# Altium PCB Receiver Board.PcbDoc
Units mil, origin at the board's own origin, x right, y up, seen from the top; angles counter-clockwise.
Board outline 2000 x 1000 mil, 2 copper layers (Top Layer, Bottom Layer); 23 components, 21 nets, 121 pads, 30 vias.
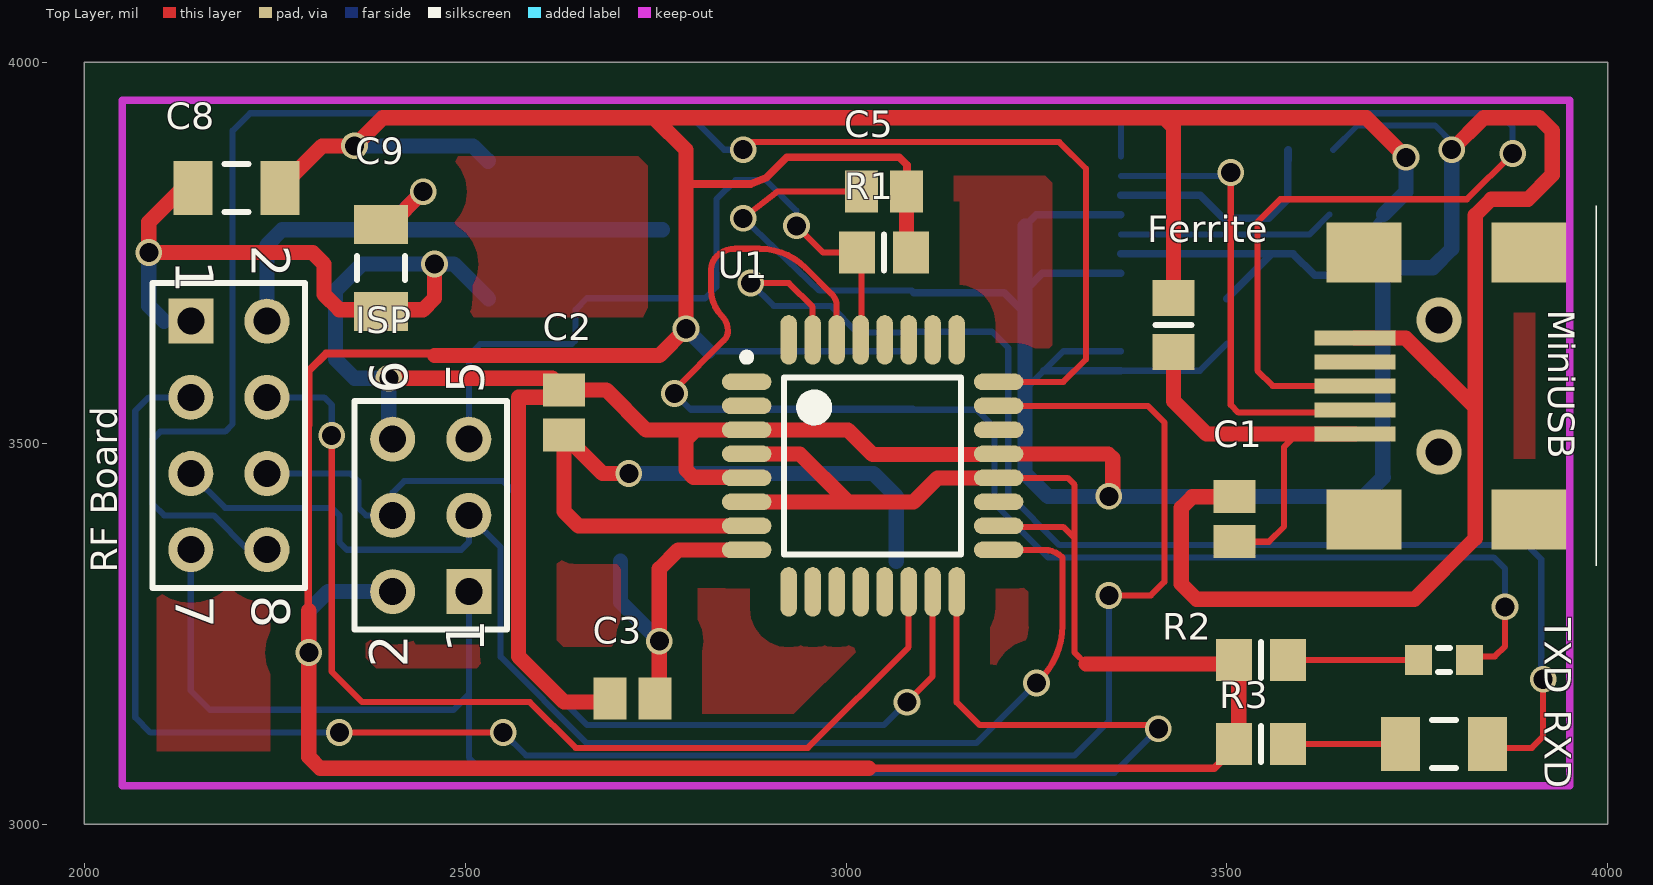
[diagram p0: Top Layer view]
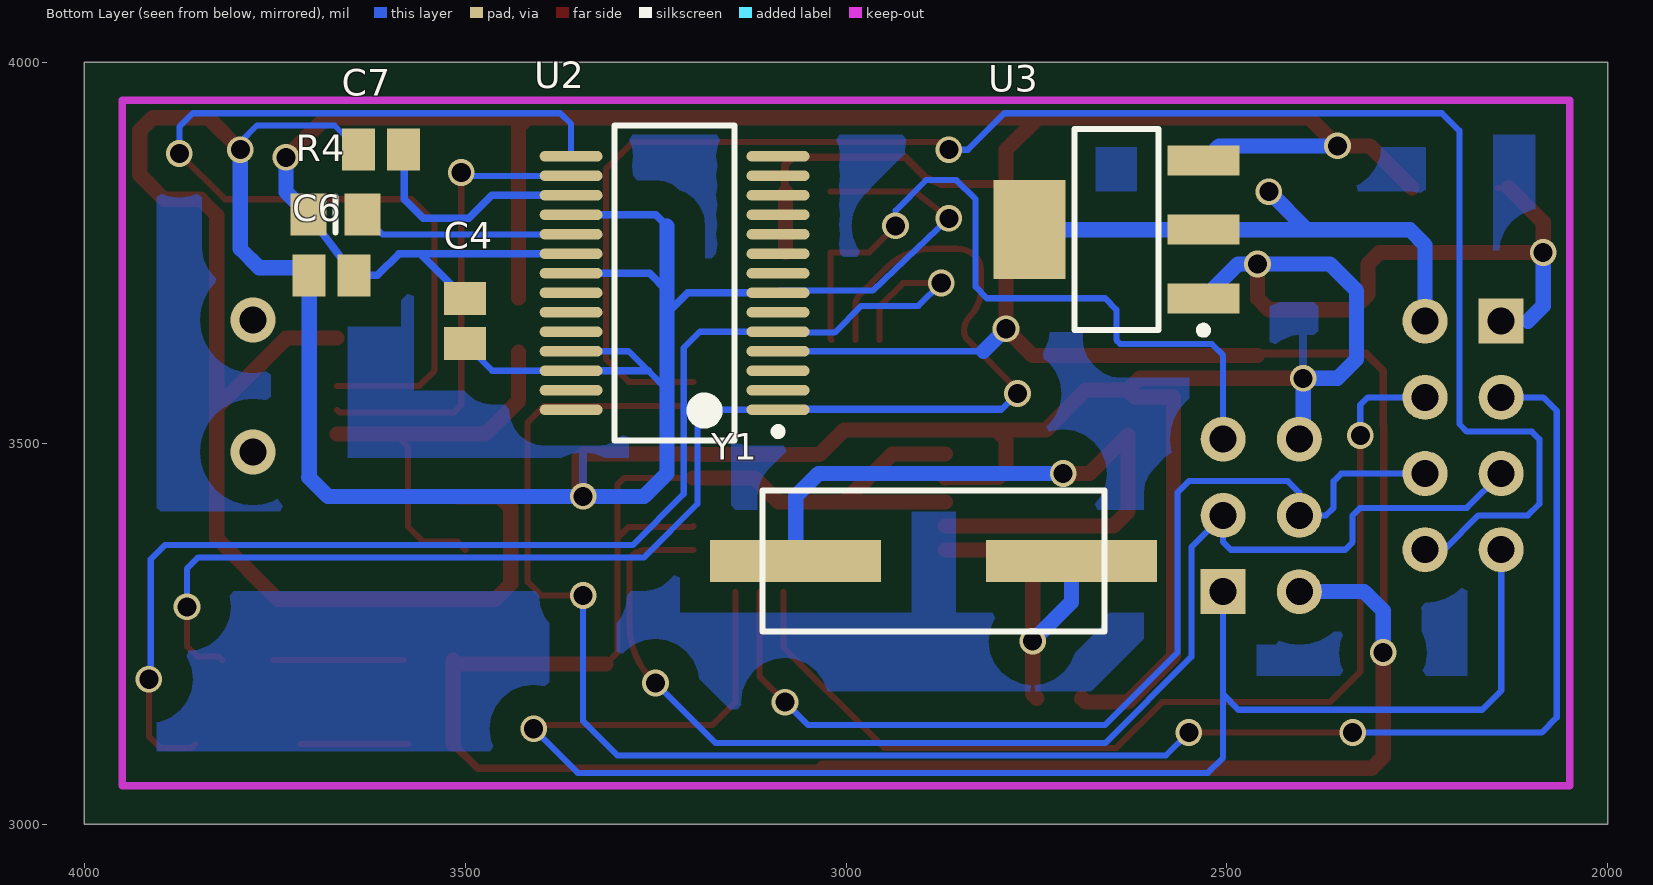
[diagram p1: Bottom Layer view, seen from below]

## Layer stack, top to bottom
Top Layer: signal copper 1.4
Dielectric: dielectric 12.6, FR-4, Dk 4.8
Bottom Layer: signal copper 1.4

## Board outline
2000,3000 4000,3000 4000,4000 2000,4000

## Design rules (kind name [scope] priority, off if disabled: settings)
Clearance "Polygon Clearance" [InPolygon] p1: gap=40
Clearance [All] p2: gap=8.1
HoleSize [All] p1: absolutevalues=TRUE maxlimit=100 minlimit=24 maxpercent=80.000 minpercent=20.000
PolygonConnect [All] p1: connectstyle=Relief reliefconductorwidth=10 reliefentries=4 polygonreliefangle="90 Angle"
RoutingVias [All] p1: holewidth=25 width=35 viastyle="Through Hole" minholewidth=25 minwidth=35 maxholewidth=25 maxwidth=35
SilkscreenOverComponentPads [All] p1: minsilkscreentomaskgap=10
SolderMaskExpansion [All] p1: expansion=4
Width [All] p1: maxlimit=50 minlimit=8 preferedwidth=8
26 further rules are at their usual default settings.

## Classes and differential pairs
component class "5V to 3.3V": C8 C9 U3
component class "2.4ghz Receiver Board": C1 C2 C3 C4 C5 C6 C7 Ferrite ISP MiniUSB R1 R2 R3 R4 "RF Board" RXD TXD U1 U2 Y1

## Components (designator, comment, footprint, x,y, rotation, side; value= is the part's Value field where it differs from the comment)
C1 "Cap Semi" CAPC2012L 3510,3400 r90 top
C2 "Cap Semi" CAPC2012L 2630,3540 r270 top
C3 "Cap Semi" CAPC2012L 2720,3165 r0 top
C4 "Cap Semi" CAPC2012L 3500,3660 r90 bottom
C5 "Cap Semi" CAPC2012L 3050,3830 r0 top
C6 "Cap Semi" CAPC2012L 3675,3720 r180 bottom
C7 "Cap Semi" CAPC2012L 3610,3885 r0 bottom
C8 "Cap Pol3 TANT" capc3216n 2200,3835 r180 top
C9 "Cap Pol3 TANT" capc3216n 2390,3730 r270 top
Ferrite "Ferrite Bead 1A" RESC2012N 3430,3655 r90 top
ISP "Header 3X2" HDR2X3 2505,3305 r90 top
MiniUSB "Mini USB" "MINI USB" 3985,3575 r180 top
R1 "Res3" RESC2012N 3050,3750 r0 top
R2 "Res3" RESC2012N 3545,3215 r0 top
R3 "Res3" RESC2012N 3545,3105 r0 top
R4 "Res3" RESC2012N 3670,3800 r180 bottom
"RF Board" "Header 4X2" HDR2X4 2140,3660 r270 top
RXD "LED2" RESC3216N 3785,3105 r0 top
TXD "LED2" RESC1608N 3785,3215 r0 top
U1 "ATmega8L-8AI" 32A_N 3035,3470 r0 top
U2 "FT232RL-Reel" SSOP-28_N 3225,3710 r0 bottom
U3 "LM1117MPX-3.3" MP04A_N 2645,3780 r0 bottom
Y1 "XTAL 8Mhz" "HC-49U - SMD" 2885,3345 r180 bottom

## Footprints (in the part's own frame and the unit in brackets; to place one, negate y for a bottom-side part, rotate by r counter-clockwise, add the part's x,y. Pads: shape width x height; smd on the part's side, far side on the other; paste and mask are expansions set on the pad)
32A_N [mm] "Thin QFP, 32-Leads, Body 7x7mm, Pitch 0.8mm, IPC Medium Density"
  oval 1.65x0.55 smd: 1(-4.2,2.8) 2(-4.2,2) 3(-4.2,1.2) 4(-4.2,0.4) 5(-4.2,-0.4) 6(-4.2,-1.2) 7(-4.2,-2) 8(-4.2,-2.8) 17(4.2,-2.8) 18(4.2,-2) 19(4.2,-1.2) 20(4.2,-0.4) 21(4.2,0.4) 22(4.2,1.2) 23(4.2,2) 24(4.2,2.8)
  oval 0.55x1.65 smd: 9(-2.8,-4.2) 10(-2,-4.2) 11(-1.2,-4.2) 12(-0.4,-4.2) 13(0.4,-4.2) 14(1.2,-4.2) 15(2,-4.2) 16(2.8,-4.2) 25(2.8,4.2) 26(2,4.2) 27(1.2,4.2) 28(0.4,4.2) 29(-0.4,4.2) 30(-1.2,4.2) 31(-2,4.2) 32(-2.8,4.2)
  silkscreen extent -4.32,-2.95 2.95,3.75, body extent -3.5,-3.5 3.5,3.5, height 1.2
CAPC2012L [mm] "Chip Capacitor, Body 2.0x1.3mm, IPC High Density"
  rect 1.1x1.4 smd: 1(-0.75,0) 2(0.75,0)
  body extent -1.1,-0.72 1.1,0.72, height 1.1
capc3216n [mm] "Chip Capacitor, Body 3.2x1.6mm, IPC Medium Density"
  rect 1.3x1.8 smd: 1(-1.45,0) 2(1.45,0)
  silkscreen extent -0.4,-0.8 0.4,0.8, body extent -1.7,-0.9 1.7,0.9, height 1.35
"HC-49U - SMD" [mm] "Quartz Crystal, Thru-Hole; 2 Leads; Body 11.35 x 4.65 x 13.46 mm (LxWxH max)"
  rect 5.7x1.4 smd: 1(-4.6,0) 2(4.6,0)
  silkscreen extent -5.7,-2.35 5.7,2.35
HDR2X3 [mm] "Connector; Header; 3x2 Position"
  rect 1.5x1.5 hole 0.9: 1(0,0)
  round 1.5 hole 0.9: 2(0,2.54) 3(2.54,0) 4(2.54,2.54) 5(5.08,0) 6(5.08,2.54)
  silkscreen extent -1.27,-1.27 6.35,3.81
HDR2X4 [mm] "Connector; Header; 4x2 Position"
  rect 1.5x1.5 hole 0.9: 1(0,0)
  round 1.5 hole 0.9: 2(0,2.54) 3(2.54,0) 4(2.54,2.54) 5(5.08,0) 6(5.08,2.54) 7(7.62,0) 8(7.62,2.54)
  silkscreen extent -1.27,-1.27 8.89,3.81
"MINI USB" [mm] "Digikey http://search.digikey.com/us/en/products/1734035-2/A31727CT-ND/773789"
  rect 2.7x0.5 smd: 1(8.05,1.6) 2(8.05,0.8) 3(8.05,0) 4(8.05,-0.8) 5(8.05,-1.6)
  rect 2.5x2 smd: NC(2.25,4.45) NC(2.25,-4.45) NC(7.75,-4.45) NC(7.75,4.45)
  silkscreen extent 0,-6 0,6
MP04A_N [mm] "SOT223, 4-Leads, Body 6.5x3.5mm, Pitch 2.3mm, Lead Span 7mm, IPC Medium Density"
  rect 2.4x1 smd: 1(-2.9,2.3) 2(-2.9,0) 3(-2.9,-2.3)
  rect 2.4x3.3 smd: 4(2.9,0)
  silkscreen extent -3.02,-3.35 1.4,3.47, body extent -1.85,-3.35 1.85,3.35, height 1.8
RESC1608N [mm] "Chip Resistor, Body 1.6x0.8mm, IPC Medium Density"
  rect 0.9x1 smd: 1(-0.85,0) 2(0.85,0)
  silkscreen extent -0.2,-0.4 0.2,0.4, body extent -0.85,-0.48 0.85,0.48, height 0.6
RESC2012N [mm] "Chip Resistor, Body 2.0x1.3mm, IPC Medium Density"
  rect 1.2x1.4 smd: 1(-0.9,0) 2(0.9,0)
  silkscreen extent 0,-0.6 0,0.6, body extent -1.07,-0.7 1.07,0.7, height 0.65
RESC3216N [mm] "Chip Resistor, Body 3.2x1.6mm, IPC Medium Density"
  rect 1.3x1.8 smd: 1(-1.45,0) 2(1.45,0)
  silkscreen extent -0.4,-0.8 0.4,0.8, body extent -1.68,-0.87 1.68,0.87, height 0.71
SSOP-28_N [mm] "SOP, 28-Leads, Body 10.2x5.3mm, Pitch 0.65mm, IPC Medium Density"
  oval 2.1x0.35 smd: 1(-3.45,4.225) 2(-3.45,3.575) 3(-3.45,2.925) 4(-3.45,2.275) 5(-3.45,1.625) 6(-3.45,0.975) 7(-3.45,0.325) 8(-3.45,-0.325) 9(-3.45,-0.975) 10(-3.45,-1.625) 11(-3.45,-2.275) 12(-3.45,-2.925) 13(-3.45,-3.575) 14(-3.45,-4.225) 15(3.45,-4.225) 16(3.45,-3.575) 17(3.45,-2.925) 18(3.45,-2.275) 19(3.45,-1.625) 20(3.45,-0.975) 21(3.45,-0.325) 22(3.45,0.325) 23(3.45,0.975) 24(3.45,1.625) 25(3.45,2.275) 26(3.45,2.925) 27(3.45,3.575) 28(3.45,4.225)
  silkscreen extent -3.57,-5.25 2,5.25, body extent -2.8,-5.25 2.8,5.25, height 2

## Part data
C1 C2 C3 C4 C5 C6 C7: "Capacitor (Semiconductor SIM Model)"
C8 C9: library part "Cap Pol3", "Polarized Capacitor (Surface Mount)"
Ferrite: library part "Ferrite Bead"
ISP: "Header, 3-Pin, Dual row"
R1 R2 R3 R4: "Resistor"
"RF Board": "Header, 4-Pin, Dual row"
RXD TXD: "Typical RED, GREEN, YELLOW, AMBER GaAs LED"
U1: "8-Bit AVR Microcontroller with 8K Bytes of In-System Programmable Flash Memory"
U2: "USB UART Asynchronous Serial Data Transfer Chip, SSOP-28, Tape and Reel"
U3: "800mA Low-Dropout Linear Regulator, 4-pin SOT-223"
Y1: library part XTAL, "Crystal Oscillator"

## Via types
v1: diameter 35, hole 25, Top Layer to Bottom Layer, 28 vias
v2: diameter 59.06, hole 35.43, Top Layer to Bottom Layer, 2 vias

## Nets (pads, with @x,y where several pads share a name; then routed paths per layer and width w, separated by ;. In a path a pad name is that pad's centre, name@x,y a point inside that pad or via, vN(x,y) a via of type N, cw(c..) or ccw(c..) an arc to the next point about the centre after c; other vN are vias at no path point)
3.3VCC: "RF Board.2" C9.1 U3.2 U3.4 | length 771.8
  Top Layer w8: C9.1@2390,3785.12 C9.1@2400.12,3785.12
  Top Layer w20: C9.1@2400.12,3785.12 v1(2445,3830)
  Bottom Layer w20: 2240,3660 2240,3760 2260,3780 2395,3780 ; v1(2445,3830) 2395,3780 ; U3.4 U3.2 2395,3780
5VCC: C4.2 C5.2 C6.2 C8.1 Ferrite.2 ISP.2 R1.2 R2.1 R3.1 R4.1 U1.4 U1.6 U1.18 U1.20 U2.4 U2.20 U3.3 | length 7291.1
  Top Layer w8: U1.18 3201.61,3390 3285,3390 3300,3375 ; U1.20 3290.75,3454.25 3300,3445 3300,3375 ; 3315,3210 3300,3225 3300,3375 ; R2.1@3510.47,3210 R2.1@3515.47,3215
  Top Layer w10: v1@2294.4,3225.6 v1(2295,3225) ; 2295,3280 2294.4,3280.6 2294.4,3522.67 2295,3523.27 2295,3595 2317.5,3617.5 2457.5,3617.5 2460,3615 ; 2790,3840 2875,3840 2896.09,3848.71 2922.38,3875 3070,3875 3080,3865 3080,3830.47 C5.2 ; 3030,3073.1 3483.57,3073.1 R3.1@3515.47,3105 ; 3345,3926.9 3350,3931.9
  Top Layer w20: C8.1 2312.09,3890 v1(2355,3890) 2391.9,3926.9 2748.1,3926.9 ; 2295,3280 v1(2295,3225) 2295,3088.1 2310,3073.1 3030,3073.1 ; 2460,3615 2755,3615 v1(2790,3650) 2790,3840 2790,3885 2748.1,3926.9 ; U1.6 3088.5,3422.76 3120,3454.25 U1.20 ; U1.4 2939.25,3485.75 3000,3425 ; R1.2@3079.53,3750 C5.2 ; 3315,3210 R2.1@3510.47,3210 ; Ferrite.2 3430,3875 3430,3915 3418.1,3926.9 ; R3.1@3515.47,3105 R2.1@3515.47,3215 ; v1(3735,3875) 3683.1,3926.9 3418.1,3926.9 ; 2748.1,3926.9 3345,3926.9 3418.1,3926.9
  Bottom Layer w8: 2819.57,3620.43 U2.4
  Bottom Layer w10: U2.20 3558.86,3748.39 ; C4.2 3558.86,3748.39 ; C6.2@3645.47,3740.04 C6.2 ; R4.1 C6.2 ; 3558.86,3748.39 3586.61,3748.39 3615,3720 C6.2
  Bottom Layer w20: v1(2295,3225) 2295,3280 2320,3305 ISP.2 ; v1(2355,3890) 2510.28,3890 2530.28,3870 U3.3 ; v1(2790,3650) 2819.57,3620.43 ; R4.1 3735,3829.57 v1(3735,3875)
\R\E\S\E\T\: ISP.5 R1.1 U1.29 | length 977.8
  Top Layer w8: v1(2935,3785) 2970,3750 3020.47,3750 3020.47,3636.57 U1.29
  Bottom Layer w8: ISP.5 2505,3615 2520,3630 2640,3630 2645,3635 2645,3675 2660,3690 2815,3690 2830,3705 2830,3820 2855,3845 2895,3845 2935,3805 v1(2935,3785)
CE: "RF Board.3" U1.23 | length 2480.7
  Top Layer w8: v1(2335,3120) v1(2550,3120) ; U1.23 3396.26,3548.74 3417.9,3527.1 3417.9,3317.9 3400,3300 v1(3345,3300)
  Bottom Layer w8: 2140,3560 2085,3560 2067.1,3542.1 2067.1,3140 2087.1,3120 v1(2335,3120) ; v1(2550,3120) 2580,3090 3300,3090 3345,3135 v1(3345,3300)
CSN: "RF Board.4" U1.14 | length 1365
  Top Layer w8: v1(2325,3510) 2325,3200 2365,3160 2585,3160 2645,3100 2950,3100 3082.24,3232.24 U1.14
  Bottom Layer w8: 2240,3560 2315,3560 2325,3550 v1(2325,3510)
GND: "RF Board.1" C1.2 C2.1 C3.1 C4.1 C5.1 C6.1 C7.2 C8.2 C9.2 ISP.6 MiniUSB.5 U1.3 U1.5 U1.21 U2.7 U2.18 U2.21 U2.25 U2.26 U3.1 | length 7262.7
  Top Layer w8: C8.2@2130,3835 C8.2@2144.88,3835 ; v1(2865,3795) 2910,3830 C5.1
  Top Layer w20: C8.2@2130,3835 2085,3790 v1(2085,3750) 2300,3750 2315,3735 2315,3695 2335,3675 2389.88,3675 2390,3674.88 2444.88,3674.88 2460,3690 v1(2460,3735) ; v1(2400,3585) 2614.53,3585 C2.1 ; C3.1 2685.47,3160 2630,3160 2570,3220 2570,3560 2620.47,3560 C2.1 ; U1.5 2868.9,3455 2800,3455 2790,3465 2790,3505 2794.4,3509.4 2794.75,3509.4 2802.59,3517.24 ; v1(3345,3430) 3350,3435 3350,3480 3344.25,3485.75 U1.21 3199.61,3485 3035,3485 3002.76,3517.24 U1.3 2802.59,3517.24 ; C1.2 3454.53,3429.53 3440,3415 3440,3315 3460,3295 3745.93,3295 3825.93,3375 3825.93,3546.63 ; MiniUSB.5 3734.57,3637.99 3825.93,3546.63 ; v1(3795,3885) 3836.9,3926.9 3910,3926.9 3926.9,3910 3926.9,3851.9 3895,3820 3846.9,3820 3825.93,3799.03 3825.93,3546.63 ; C2.1 2685.47,3569.53 2737.76,3517.24 2802.59,3517.24
  Bottom Layer w8: 2105,3660 2140,3660 ; v1(2865,3795) 2965,3700 U2.7@3086.38,3700 ; 3235,3570 3259.84,3594.84 3285.43,3620.43 U2.25 U2.25@3360.39,3620 ; U2.26 3464.37,3594.84 C4.1 ; C7.2 3671.33,3916.8 3773.2,3916.8 3795,3895 v1(3795,3885)
  Bottom Layer w10: U2.7 3207.8,3697.2 3235,3670 ; 3235,3700 3257.8,3722.8 U2.21 ; 3235,3785 3249.57,3799.57 U2.18 ; 3259.84,3594.84 U2.26
  Bottom Layer w20: v1(2085,3750) 2085,3680 2105,3660 ; ISP.6 2400,3510 v1(2400,3585) 2355,3585 2330,3610 2330,3700 2365,3735 v1(2460,3735) 2485.28,3735 U3.1 ; 3235,3785 3235,3700 3235,3670 3235,3570 3235,3460 3265,3430 v1(3345,3430) 3680,3430 3705,3455 3704.53,3455.47 C6.1 3714.53,3730 3770,3730 3795,3755 v1@3795,3870
IRQ: "RF Board.8" U1.24 | length 2303.1
  Top Layer w8: v1(2865,3885) 2875,3895 3280,3895 3315,3860 3315,3610 3285.24,3580.24 U1.24
  Bottom Layer w8: 2240,3360 2215,3360 2170,3405 2105,3405 2090,3420 2090,3505 2100,3515 2185,3515 2195,3525 2195,3910 2217.9,3932.9 2792.1,3932.9 2840,3885 v1(2865,3885)
MISO: "RF Board.7" ISP.1 U1.16 | length 2147.9
  Top Layer w8: U1.16 3145.24,3159.76 3175,3130 3405,3130 v1(3410,3125)
  Bottom Layer w8: 2140,3360 2140,3175 2165,3150 2485,3150 2505,3170 ; ISP.1 2505,3170 ; v1(3410,3125) 3352.1,3067.1 2525,3067.1 2505,3087.1 2505,3170
MOSI: "RF Board.6" ISP.4 U1.15 | length 1346.1
  Top Layer w8: v1(3080,3160) 3113.74,3193.74 U1.15
  Bottom Layer w8: 2240,3460 2350,3460 2360,3450 2360,3415 2370,3405 ISP.4 2405,3435 2420,3450 2550,3450 2565,3435 2565,3225 2660,3130 3050,3130 v1(3080,3160)
NetC1_1: C1.1 Ferrite.1 MiniUSB.1 | length 537.1
  Top Layer w8: C1.1@3499.53,3360 C1.1 3555,3370.47 3575,3390.47 3575,3495 3592.01,3512.01
  Top Layer w20: Ferrite.1 3430,3555 3472.99,3512.01 3592.01,3512.01 MiniUSB.1
NetC2_2: C2.2 U1.7 Y1.1 | length 902.3
  Top Layer w20: v1(2715,3460) 2680.47,3460 2655.47,3485 C2.2 2630,3435 2630,3410 2648.74,3391.26 U1.7
  Bottom Layer w20: v1(2715,3460) 3036.1,3460 3066.1,3430 Y1.1
NetC3_2: C3.2 U1.8 Y1.2 | length 423.3
  Top Layer w20: C3.2 2755,3170.47 v1(2755,3240) 2755,3335 2779.76,3359.76 U1.8
  Bottom Layer w20: Y1.2 2703.9,3291.1 v1(2755,3240)
NetC7_1: C7.1 U2.17 | length 320.7
  Bottom Layer w10: U2.17 3464.84,3825.16 3495,3795 3555,3795 3580,3820 3580,3884.53 C7.1 C7.1@3580.47,3871.5
NetR2_2: R2.2 TXD.1 | length 171.1
  Top Layer w8: R2.2 TXD.1
NetR3_2: R3.2 RXD.1 | length 141.6
  Top Layer w8: R3.2@3574.53,3105 RXD.1@3716.1,3105
NetR4_2: R4.2 U2.19 | length 284.5
  Bottom Layer w8: U2.19 3608.54,3773.98 R4.2
NetRXD_2: RXD.2 U1.31 U2.5 | length 1741.4
  Top Layer w8: v1(2875,3710) 2925,3710 2956.26,3678.74 U1.31 ; RXD.2@3853.9,3105 3858.9,3100 3900,3100 3915,3115 v1(3915,3190)
  Bottom Layer w8: v1(2875,3710) 2905,3680 2980,3680 3015,3645 3088.15,3645 U2.5 3191.88,3646.02 3212.9,3625 3212.9,3433.2 3280,3366.1 3893.9,3366.1 3912.5,3347.5 3912.5,3192.5 v1(3915,3190)
NetTXD_2: TXD.2 U1.30 U2.1 | length 2147.4
  Top Layer w8: v1(2775,3565) 2775,3570 2839.69,3634.69 ccw(c2826.86,3647.51) 2845,3647.51 ccw(c2817.87,3647.51) 2837.05,3666.7 cw(c2870.9,3700.54) 2823.04,3700.54 ; U1.30 2987.76,3680 ccw(c2965.87,3680) 2981.34,3695.48 2946.82,3730 ccw(c2886.47,3669.64) 2886.47,3755 2854.14,3755 ccw(c2854.14,3720.86) 2830,3745 ccw(c2846.81,3728.19) 2823.04,3728.19 2823.04,3700.77 ; TXD.2 3823.46,3220 3851.73,3220 3865,3233.27 v1(3865,3285) ; 2823.04,3700.54 cw(c2838.27,3700.77) 2823.04,3700.77 ; 2823.04,3700.54 2823.04,3700.77
  Bottom Layer w8: v1(2775,3565) 2795,3545 ; v1(3865,3285) 3865,3335 3850,3350 3265,3350 3195,3420 3195,3520 3171.34,3543.66 U2.1 ; 2795,3545 3087.83,3545 U2.1 ; 2795,3545 2796.34,3543.66 U2.1
SCK: "RF Board.5" ISP.3 U1.17 | length 1712.7
  Top Layer w8: U1.17 3260.33,3359.76 cw(c3260.33,3326.43) 3283.9,3350 3283.9,3260.32 cw(c3183.9,3260.32) 3254.61,3189.61 v1(3250,3185)
  Bottom Layer w8: 2140,3460 2185,3415 2325,3415 2335,3405 2335,3370 2345,3360 2495,3360 2505,3370 ISP.3 2546.63,3363.37 2546.63,3219.47 2660,3106.1 3171.1,3106.1 v1(3250,3185)
USBDM: MiniUSB.2 U2.16 | length 619.6
  Top Layer w8: v1(3505,3855) 3505,3550 3515,3540 3664.57,3540 MiniUSB.2
  Bottom Layer w8: U2.16 3500.75,3850.75 v1(3505,3855)
USBDP: MiniUSB.3 U2.15 | length 1308.5
  Top Layer w8: MiniUSB.3 3560,3575 3540,3595 3540,3790 3570,3820 3815,3820 v1(3875,3880)
  Bottom Layer w8: U2.15 3360.83,3918.73 3375,3932.9 3857.1,3932.9 3875,3915 v1(3875,3880)
pads on no net: MiniUSB.4 MiniUSB.NC U1.1 U1.2 U1.9 U1.10 U1.11 U1.12 U1.13 U1.19 U1.22 U1.25 U1.26 U1.27 U1.28 U1.32 U2.2 U2.3 U2.6 U2.8 U2.9 U2.10 U2.11 U2.12 U2.13 U2.14 U2.22 U2.23 U2.24 U2.27 U2.28
copper on no net:
  other v2: 3778.31,3488.39 3778.31,3661.61

## Polygon pours and split planes (outlines as drawn)
GND on Top Layer "Top Layer-No Net" (solid, pour order 2): 2025,3975 3975,3975 3975,3025 2025,3025
GND on Bottom Layer "bottom" (solid, pour order 4): 2025,3975 3975,3975 3975,3025 2025,3025

## Keep-outs
Keep-Out Layer:
  lines w10: 2050,3050 2050,3950 3950,3950 3950,3050 2050,3050

## Dimensions
2050,3050 to 2050,3950 on Mechanical 1
2050,3050 to 3950,3050 on Mechanical 1

## Text inside footprints (layer, text, board x,y; h text height)
ISP: Top Overlay "6" at 2425,3565 h50 r90; Top Overlay "5" at 2525,3565 h50 r90; Top Overlay "2" at 2425,3205 h50 r90; Top Overlay "1" at 2525,3225 h50 r90
"RF Board": Top Overlay "2" at 2220,3760 h50 r270; Top Overlay "1" at 2120,3740 h50 r270; Top Overlay "7" at 2120,3300 h50 r270; Top Overlay "8" at 2220,3300 h50 r270